# Altium PCB HandlebarToucFPCB_v1.1.PcbDoc
Units mil, origin at the board's own origin, x right, y up, seen from the top; angles counter-clockwise.
Board outline 8851 x 2671.9 mil, 2 copper layers (Top Layer, Bottom Layer); 3 components, 10 nets, 20 pads, 7 vias.
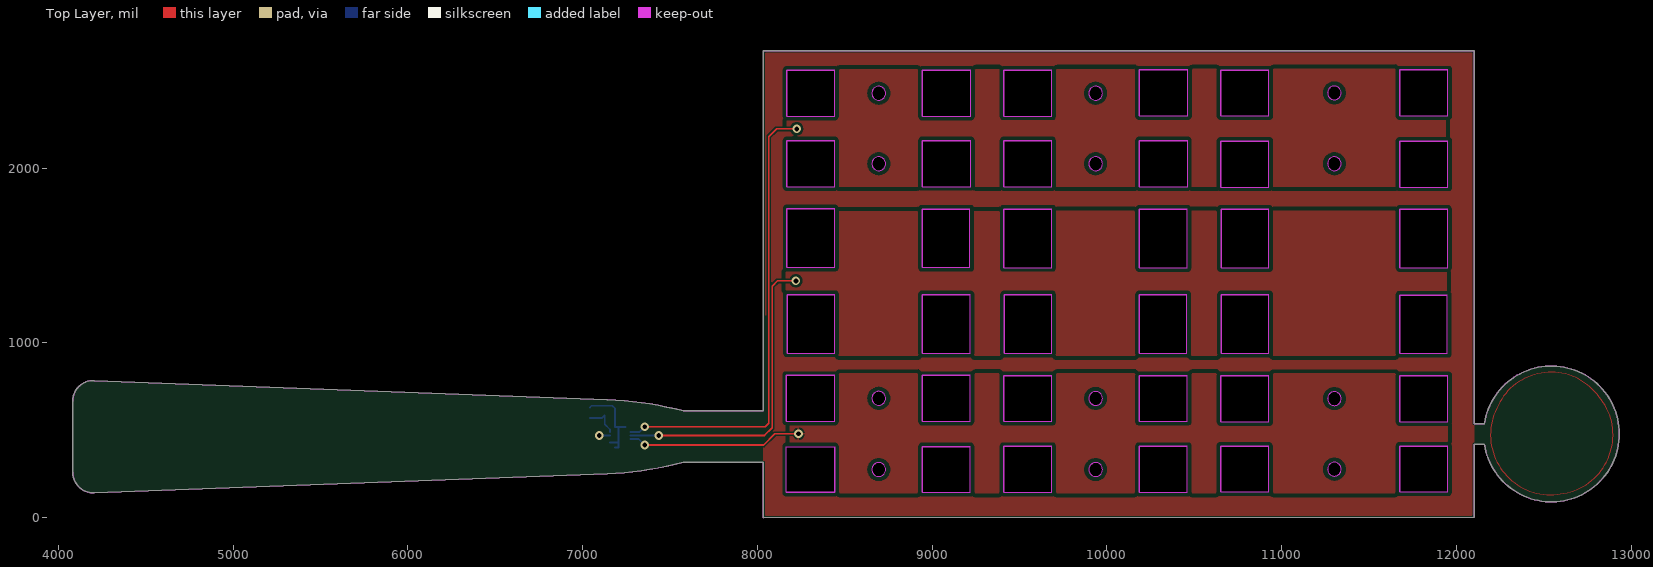
[diagram p0: Top Layer view]
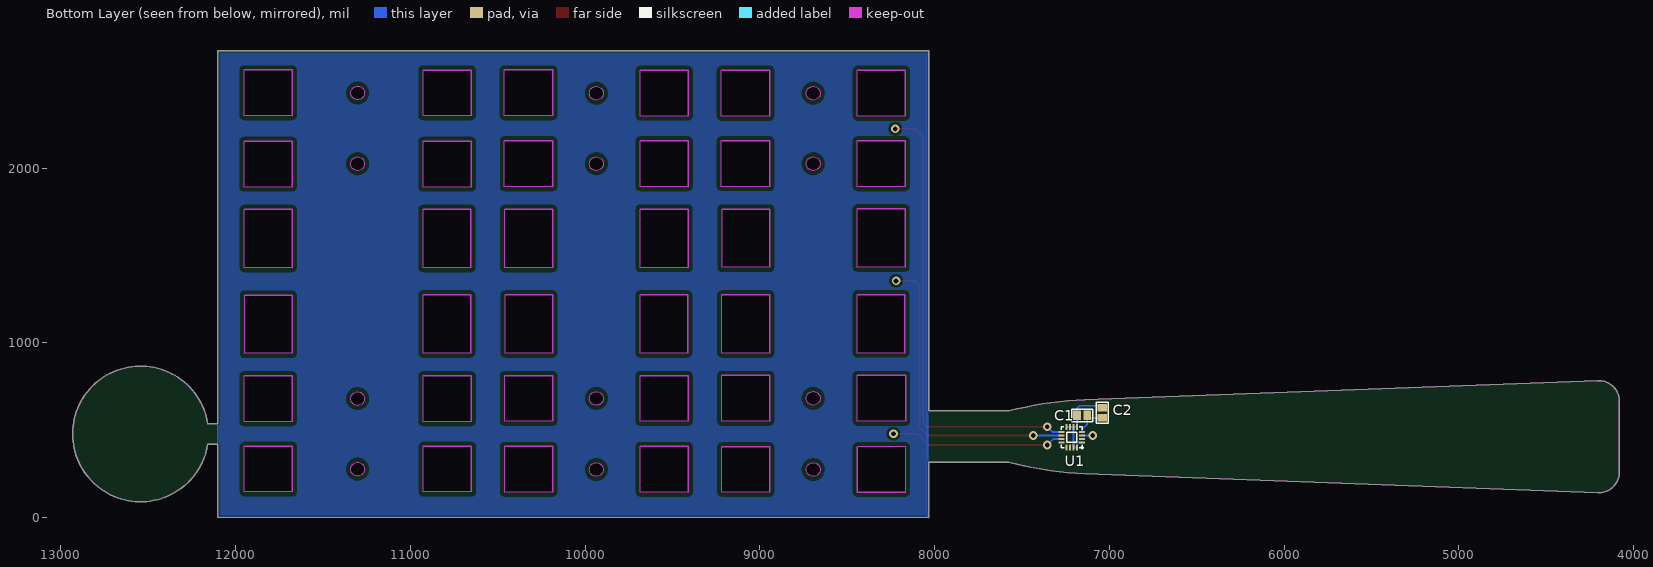
[diagram p1: Bottom Layer view, seen from below]

## Layer stack, top to bottom
Top Solder: solder mask 0.4, Solder Resist, Dk 3.5
Top Layer: signal copper 1.4
Dielectric 1: dielectric 12.6, FR-4, Dk 4.8
Bottom Layer: signal copper 1.4
Bottom Solder: solder mask 0.4, Solder Resist, Dk 3.5

## Board outline
4081.32,260.12 ccw(c4199.43,260.12) 4203.81,142.09 7140.08,251.17 ccw(c7059.8,2278.44) 7575.35,316.18 8034.56,316.18 8034.56,0.25 12100.8,1.69 12101.03,419.96 12160.09,419.96 ccw(c12543.95,479.02) 12160.09,538.07 12101.03,538.07 12102.1,2672.15 8033.4,2672.15 8034.56,610.36 7575.35,610.36 ccw(c7059.8,-1351.9) 7140.08,675.37 4203.81,784.45 ccw(c4199.43,666.42) 4081.32,666.42
cut-out: 8654.92,275.18 ccw(c8694.29,275.18) 8694.29,235.81 ccw(c8694.29,275.18) 8733.66,275.18 ccw(c8694.29,275.18) 8694.29,314.55 ccw(c8694.29,275.18)
cut-out: 8654.92,682.85 ccw(c8694.29,682.85) 8694.29,643.48 ccw(c8694.29,682.85) 8733.66,682.85 ccw(c8694.29,682.85) 8694.29,722.22 ccw(c8694.29,682.85)
cut-out: 8166.26,552.32 8441.85,552.32 8441.85,813.38 8166.26,813.38
cut-out: 8166.26,144.65 8166.26,405.71 8441.85,405.71 8441.85,144.65
cut-out: 8168.39,2298.11 8441.85,2298.11 8441.85,2559.1 8168.39,2559.1
cut-out: 8168.39,1894.5 8441.85,1894.5 8441.85,2155.7 8168.39,2155.7
cut-out: 8168.96,1432.2 8441.85,1432.2 8441.85,1766.63 8168.96,1766.63
cut-out: 8170.41,941.96 8441.85,941.96 8441.85,1276.42 8170.41,1276.42
cut-out: 11262.36,277.15 ccw(c11301.73,277.15) 11301.73,237.78 ccw(c11301.73,277.15) 11341.1,277.15 ccw(c11301.73,277.15) 11301.73,316.52 ccw(c11301.73,277.15)
cut-out: 11262.36,680.9 ccw(c11301.73,680.9) 11301.73,641.53 ccw(c11301.73,680.9) 11341.1,680.9 ccw(c11301.73,680.9) 11301.73,720.27 ccw(c11301.73,680.9)
cut-out: 11262.29,2025.2 ccw(c11301.66,2025.2) 11301.66,1985.83 ccw(c11301.66,2025.2) 11341.03,2025.2 ccw(c11301.66,2025.2) 11301.66,2064.57 ccw(c11301.66,2025.2)
cut-out: 11262.29,2430.59 ccw(c11301.66,2430.59) 11301.66,2391.22 ccw(c11301.66,2430.59) 11341.03,2430.59 ccw(c11301.66,2430.59) 11301.66,2469.96 ccw(c11301.66,2430.59)
cut-out: 9896.14,275.18 ccw(c9935.51,275.18) 9935.51,235.81 ccw(c9935.51,275.18) 9974.88,275.18 ccw(c9935.51,275.18) 9935.51,314.55 ccw(c9935.51,275.18)
cut-out: 9896.14,682.02 ccw(c9935.51,682.02) 9935.51,642.65 ccw(c9935.51,682.02) 9974.88,682.02 ccw(c9935.51,682.02) 9935.51,721.39 ccw(c9935.51,682.02)
cut-out: 9896.14,2025.2 ccw(c9935.51,2025.2) 9935.51,1985.83 ccw(c9935.51,2025.2) 9974.88,2025.2 ccw(c9935.51,2025.2) 9935.51,2064.57 ccw(c9935.51,2025.2)
cut-out: 9896.14,2428.61 ccw(c9935.51,2428.61) 9935.51,2389.24 ccw(c9935.51,2428.61) 9974.88,2428.61 ccw(c9935.51,2428.61) 9935.51,2467.98 ccw(c9935.51,2428.61)
cut-out: 8654.92,2025.2 ccw(c8694.29,2025.2) 8694.29,1985.83 ccw(c8694.29,2025.2) 8733.66,2025.2 ccw(c8694.29,2025.2) 8694.29,2064.57 ccw(c8694.29,2025.2)
cut-out: 8654.92,2428.61 ccw(c8694.29,2428.61) 8694.29,2389.24 ccw(c8694.29,2428.61) 8733.66,2428.61 ccw(c8694.29,2428.61) 8694.29,2467.98 ccw(c8694.29,2428.61)
cut-out: 10185.31,940.79 10457.98,940.79 10457.98,1274.65 10185.31,1274.65
cut-out: 10185.31,1430.85 10460.38,1430.85 10460.38,1764.72 10185.31,1764.72
cut-out: 9410.89,1431.27 9685.01,1431.27 9685.01,1765.65 9410.89,1765.65
cut-out: 9412.61,941.15 9685.01,941.15 9685.01,1275.53 9412.61,1275.53
cut-out: 9409.42,550.8 9685.01,550.8 9685.01,813.24 9409.42,813.24
cut-out: 10185.31,550.8 10460.9,550.8 10460.9,813.24 10185.31,813.24
cut-out: 10651.57,549.42 10927.16,549.42 10927.16,812.37 10651.57,812.37
cut-out: 10654.77,940.27 10927.16,940.27 10927.16,1274.51 10654.77,1274.51
cut-out: 10653.04,1430.29 10927.16,1430.29 10927.16,1764.58 10653.04,1764.58
cut-out: 10651.78,1892.04 10927.16,1892.04 10927.16,2154.4 10651.78,2154.4
cut-out: 10185.31,1892.79 10461.21,1892.79 10461.21,2155.6 10185.31,2155.6
cut-out: 9409.81,1892.79 9685.01,1892.79 9685.01,2155.6 9409.81,2155.6
cut-out: 8942.77,1894.71 9220.19,1894.71 9220.19,2155.7 8942.77,2155.7
cut-out: 8942.77,1431.65 9215.96,1431.65 9215.96,1766 8942.77,1766
cut-out: 8942.77,941.49 9217.76,941.49 9217.76,1275.87 8942.77,1275.87
cut-out: 8942.77,552.32 9218.36,552.32 9218.36,813.38 8942.77,813.38
cut-out: 8942.77,144.65 9218.36,144.65 9218.36,405.71 8942.77,405.71
cut-out: 9409.42,144.79 9685.01,144.79 9685.01,407.23 9409.42,407.23
cut-out: 10185.31,144.79 10460.9,144.79 10460.9,407.23 10185.31,407.23
cut-out: 10650.53,146.89 10926.12,146.89 10926.12,407.4 10650.53,407.4
cut-out: 11675.15,146.89 11950.74,146.89 11950.74,407.4 11675.15,407.4
cut-out: 11675.73,549.42 11951.32,549.42 11951.32,812.37 11675.73,812.37
cut-out: 11675.73,939.66 11948.68,939.66 11948.68,1273.6 11675.73,1273.6
cut-out: 11675.73,1429.77 11950.92,1429.77 11950.92,1763.93 11675.73,1763.93
cut-out: 11675.73,1892.04 11951.55,1892.04 11951.55,2154.4 11675.73,2154.4
cut-out: 11675.73,2299.41 11951.55,2299.41 11951.55,2561.77 11675.73,2561.77
cut-out: 10652.41,2299.41 10927.16,2299.41 10927.16,2561.16 10652.41,2561.16
cut-out: 10185.31,2299.3 10462.15,2299.3 10462.15,2561.77 10185.31,2561.77
cut-out: 9410.32,2298.21 9685.01,2298.21 9685.01,2560.06 9410.32,2560.06
cut-out: 8942.77,2298.11 9220.19,2298.11 9220.19,2559.1 8942.77,2559.1

## Design rules (kind name [scope] priority, off if disabled: settings)
Clearance [All] p1: gap=10 ignorepadtopadclearanceinfootprint=FALSE except(8: Arc-Arc Arc-Track Arc-SMDPad Track-Track Track-SMDPad SMDPad-SMDPad SMDPad-THPad SMDPad-Via SMDPad-Fill SMDPad-Poly SMDPad-Region SMDPad-Text SMDPad-Hole; 25: THPad-THPad THPad-Via THPad-Fill THPad-Poly THPad-Region THPad-Text THPad-Hole Fill-Fill Fill-Poly Fill-Region Fill-Text Fill-Hole Poly-Poly Poly-Region Poly-Text Poly-Hole Region-Region Region-Text Region-Hole Text-Text Text-Hole)
PolygonConnect [All] p1: connectstyle=Relief reliefconductorwidth=10 reliefentries=4 polygonreliefangle="90 Angle" airgapwidth=10
RoutingVias [All] p1: holewidth=28 width=50 viastyle="Through Hole" minholewidth=28 minwidth=50 maxholewidth=28 maxwidth=50
SolderMaskExpansion [All] p1: expansion=4
Width [All] p1: maxlimit=10 minlimit=10 preferedwidth=10
30 further rules are at their usual default settings.

## Components (designator, comment, footprint, x,y, rotation, side; value= is the part's Value field where it differs from the comment)
C1 "Cap" "CAP 0805 b" 7155.47,585 r180 bottom value=0.1uF
C2 "Cap" "CAP 0805 b" 7040,600 r270 bottom value=1uF
U1 "CAP1298" "QFN-COL 16 (3x3)  V2" 7215,460 r0 bottom

## Footprints (in the part's own frame and the unit in brackets; to place one, negate y for a bottom-side part, rotate by r counter-clockwise, add the part's x,y. Pads: shape width x height; smd on the part's side, far side on the other; paste and mask are expansions set on the pad)
"CAP 0805 b" [mm] "Chip Capacitor, Body 2.0x1.3mm, IPC High Density"
  rect 1.1x1.4 smd: 1(-0.75,0) 2(0.75,0)
  silkscreen extent -1.52,-0.89 1.52,0.89, body extent -1.1,-0.72 1.1,0.72, height 1.4
"QFN-COL 16 (3x3)  V2" [mm] "PQFN, 16-Leads, Body 3.5x3.5mm, Pitch 0.5mm, NSC Recommended"
  rect 0.9x0.28 smd mask+0.051: 1(-1.5,0.75) 2(-1.5,0.25) 3(-1.5,-0.25) 4(-1.5,-0.75) 9(1.5,-0.75) 10(1.5,-0.25) 11(1.5,0.25) 12(1.5,0.75)
  rect 0.28x0.9 smd mask+0.051: 5(-0.75,-1.5) 6(-0.25,-1.5) 7(0.25,-1.5) 8(0.75,-1.5) 13(0.75,1.5) 14(0.25,1.5) 15(-0.25,1.5) 16(-0.75,1.5)
  silkscreen extent -1.65,-1.5 1.5,1.65, body extent -1.52,-1.52 1.52,1.52, height 1.1

## Part data
C1: library part "Cap Semi", "YAGEO (PHYCOMP)  CC0805KRX7R8BB104  COND, CERÁ MULT, X7R, 100NF, 25V, 0805", Supplier Part Number 1=644249, LatestRevisionDate=29-May-2009, LatestRevisionNote="IPC-7351 Footprint Added.", PackageDescription="Chip Capacitor", PackageReference=C1206, Published=8-Jun-2000, Publisher="Altium Limited", Supplier 1=Farnell
C2: library part "Cap Semi", "TAIYO YUDEN  TMK212BJ105KG-T  COND, CERÁ MULT, X5R, 1UF, 25V, 0805", Supplier Part Number 1=2112855, LatestRevisionDate=29-May-2009, LatestRevisionNote="IPC-7351 Footprint Added.", PackageDescription="Chip Capacitor", PackageReference=C1206, Published=8-Jun-2000, Publisher="Altium Limited", Supplier 1=Farnell
U1: Supplier Part Number 1=2373292, Supplier 1=Farnell

## Via types
v1: diameter 50, hole 28, Top Layer to Bottom Layer, 7 vias

## Nets (pads, with @x,y where several pads share a name; then routed paths per layer and width w, separated by ;. In a path a pad name is that pad's centre, name@x,y a point inside that pad or via, vN(x,y) a via of type N, cw(c..) or ccw(c..) an arc to the next point about the centre after c; other vN are vias at no path point)
5V: C1.2 C2.2 U1.4 | length 199.9
  Bottom Layer w10: C2.2 7111.42,570.47 C1.2 7125.94,534.06 7155.94,504.06 U1.4
GND: C1.1 C2.1 U1.1 U1.5 U1.6 U1.7 U1.8 U1.15 U1.16 | length 507.1
  Bottom Layer w10: C2.1 7050.47,640 7170,640 7185.47,624.53 U1.5 U1.6 ; U1.1 7204.69,430.47 7205.16,430 ; U1.16 U1.15@7204.33,400.94 ; U1.15 7205.16,430 ; U1.8 U1.7 U1.6 ; 7205.16,430 U1.6
Pad_1: U1.9 | length 2630.5
  Top Layer w10: v1(7355,520) 8045,520 8065,540 8065,2180 8110,2225 v1(8225,2225)
  Bottom Layer w10: U1.9 7324.53,489.53 v1(7355,520)
Pad_2: U1.10 | length 1787.1
  Top Layer w10: v1(7435,470) 8040,470 8085,515 8085,1325 8115,1355 v1(8220,1355)
  Bottom Layer w10: U1.10 7434.84,469.84 v1(7435,470)
Pad_3: U1.11 | length 1002.4
  Top Layer w10: v1(7355,415) 8035,415 8100,480 v1(8235,480)
  Bottom Layer w10: U1.11 7319.84,450.16 v1(7355,415)
Pad_4: U1.13
Pad_5: U1.14
SCL: U1.3 | length 60.9
  Bottom Layer w10: v1(7095,469.84) U1.3
SDA: U1.2
SignalGuard: U1.12

## Polygon pours and split planes (outlines as drawn)
no net on Bottom Layer (solid, pour order 16): 8033.4,2672.15 8034.56,2670.98 8034.56,0.25 12099.75,0.25 12100,0 12102.09,2.09 12102.09,2660
SignalGuard on Bottom Layer "Bottom Layer-SignalGuard" (solid, shelved, pour order 10): 8045,2670 8045,10.69 8036.01,1.69 12100.8,1.69 12100.8,2661.35 12090,2672.15
no net on Bottom Layer "Bottom Layer-No Net" (solid, pour order 6): 12495,2195
no net on Top Layer (solid, pour order 20): 8033.4,2672.15 8034.56,2670.98 8034.56,10 12085,10 12102.1,27.1 12102.1,2672.15
no net on Top Layer (solid, pour order 12): 8170,2565 8168.39,2563.39 8168.39,1894.5 11949.08,1894.5 11940,1903.58 11940,2570
Pad_1 on Top Layer "Bottom Layer-Pad_1" (solid, pour order 4): 8160.9,1753.67 8160.9,926.29 11944.06,926.29 11944.06,1756.34
Pad_3 on Top Layer "Bottom Layer-Pad_3" (solid, pour order 0): 8185,825 8185,140 11943.84,140 11951.32,147.47 11951.32,825
no net on Top Layer (solid, pour order 28): 12805,705 ccw(c12541.45,495.35) 12230.45,624.55 ccw(c12536.79,473.25) 12595.45,136.64 ccw(c12557.7,473.37)
no net on Top Layer (solid, pour order 26): 12480,640

## Keep-outs
Keep-Out Layer:
  circle w0.5: c8694.29,682.85 r39.37
  circle w0.5: c8694.29,275.18 r39.37
  circle w0.5: c8694.29,2025.2 r39.37
  circle w0.5: c8694.29,2428.61 r39.37
  circle w0.5: c9935.51,2428.61 r39.37
  circle w0.5: c9935.51,2025.2 r39.37
  circle w0.5: c11301.66,2025.2 r39.37
  circle w0.5: c11301.66,2430.59 r39.37
  circle w0.5: c9935.51,682.02 r39.37
  circle w0.5: c11301.73,680.9 r39.37
  circle w0.5: c9935.51,275.18 r39.37
  circle w0.5: c11301.73,277.15 r39.37
  lines w0.5: 4081.32,260.12 ccw(c4199.43,260.12) 4203.81,142.09 7140.08,251.17 ccw(c7059.8,2278.44) 7575.35,316.18 8034.56,316.18 8034.56,0.25 12100.8,1.69 12101.03,419.96 12160.09,419.96 ccw(c12543.95,479.02) 12160.09,538.07 12101.03,538.07 12102.1,2672.15 8033.4,2672.15 8034.56,610.36 7575.35,610.36 ccw(c7059.8,-1351.9) 7140.08,675.37 4203.81,784.45 ccw(c4199.43,666.42) 4081.32,666.42 4081.32,260.12 ; 8166.26,144.65 8441.85,144.65 8441.85,405.71 8166.26,405.71 8166.26,144.65 ; 8166.26,552.32 8441.85,552.32 8441.85,813.38 8166.26,813.38 8166.26,552.32 ; 8168.39,1894.5 8441.85,1894.5 8441.85,2155.7 8168.39,2155.7 8168.39,1894.5 ; 8168.39,2298.11 8441.85,2298.11 8441.85,2559.1 8168.39,2559.1 8168.39,2298.11 ; 8168.96,1432.2 8441.85,1432.2 8441.85,1766.63 8168.96,1766.63 8168.96,1432.2 ; 8170.41,941.96 8441.85,941.96 8441.85,1276.42 8170.41,1276.42 8170.41,941.96 ; 8942.77,144.65 9218.36,144.65 9218.36,405.71 8942.77,405.71 8942.77,144.65 ; 8942.77,552.32 9218.36,552.32 9218.36,813.38 8942.77,813.38 8942.77,552.32 ; 8942.77,941.49 9217.76,941.49 9217.76,1275.87 8942.77,1275.87 8942.77,941.49 ; 8942.77,1431.65 9215.96,1431.65 9215.96,1766 8942.77,1766 8942.77,1431.65 ; 8942.77,1894.71 9220.19,1894.71 9220.19,2155.7 8942.77,2155.7 8942.77,1894.71 ; 8942.77,2298.11 9220.19,2298.11 9220.19,2559.1 8942.77,2559.1 8942.77,2298.11 ; 9409.42,144.79 9685.01,144.79 9685.01,407.23 9409.42,407.23 9409.42,144.79 ; 9409.42,550.8 9685.01,550.8 9685.01,813.24 9409.42,813.24 9409.42,550.8 ; 9409.81,1892.79 9685.01,1892.79 9685.01,2155.6 9409.81,2155.6 9409.81,1892.79 ; 9410.32,2298.21 9685.01,2298.21 9685.01,2560.06 9410.32,2560.06 9410.32,2298.21 ; 9410.89,1431.27 9685.01,1431.27 9685.01,1765.65 9410.89,1765.65 9410.89,1431.27 ; 9412.61,941.15 9685.01,941.15 9685.01,1275.53 9412.61,1275.53 9412.61,941.15 ; 10185.31,144.79 10460.9,144.79 10460.9,407.23 10185.31,407.23 10185.31,144.79 ; 10185.31,550.8 10460.9,550.8 10460.9,813.24 10185.31,813.24 10185.31,550.8 ; 10185.31,940.79 10185.31,1274.65 10457.98,1274.65 10457.98,940.79 10185.31,940.79 ; 10185.31,1430.85 10185.31,1764.72 10460.38,1764.72 10460.38,1430.85 10185.31,1430.85 ; 10185.31,1892.79 10461.21,1892.79 10461.21,2155.6 10185.31,2155.6 10185.31,1892.79 ; 10185.31,2299.3 10462.15,2299.3 10462.15,2561.77 10185.31,2561.77 10185.31,2299.3 ; 10650.53,146.89 10926.12,146.89 10926.12,407.4 10650.53,407.4 10650.53,146.89 ; 10651.57,549.42 10927.16,549.42 10927.16,812.37 10651.57,812.37 10651.57,549.42 ; 10651.78,1892.04 10927.16,1892.04 10927.16,2154.4 10651.78,2154.4 10651.78,1892.04 ; 10652.41,2299.41 10927.16,2299.41 10927.16,2561.16 10652.41,2561.16 10652.41,2299.41 ; 10653.04,1430.29 10927.16,1430.29 10927.16,1764.58 10653.04,1764.58 10653.04,1430.29 ; 10654.77,940.27 10927.16,940.27 10927.16,1274.51 10654.77,1274.51 10654.77,940.27 ; 11675.15,146.89 11950.74,146.89 11950.74,407.4 11675.15,407.4 11675.15,146.89 ; 11675.73,549.42 11951.32,549.42 11951.32,812.37 11675.73,812.37 11675.73,549.42 ; 11675.73,939.66 11675.73,1273.6 11948.68,1273.6 11948.68,939.66 11675.73,939.66 ; 11675.73,1429.77 11675.73,1763.93 11950.92,1763.93 11950.92,1429.77 11675.73,1429.77 ; 11675.73,1892.04 11951.55,1892.04 11951.55,2154.4 11675.73,2154.4 11675.73,1892.04 ; 11675.73,2299.41 11951.55,2299.41 11951.55,2561.77 11675.73,2561.77 11675.73,2299.41

## Other copper
Top Layer:
  pour cut-out: 10185.31,1892.79 10461.21,1892.79 10461.21,2155.6 10185.31,2155.6